# Altium PCB ENCITECH_6211-0100-43.PcbDoc
Units mm, origin at the board's own origin, x right, y up, seen from the top; angles counter-clockwise.
Board outline 24 x 39.5 mm, 4 copper layers (Top Layer, L2_GND, L3_PWR, Bottom Layer), stack 1.58 mm thick; 2 components, 0 nets, 52 pads, 0 vias.
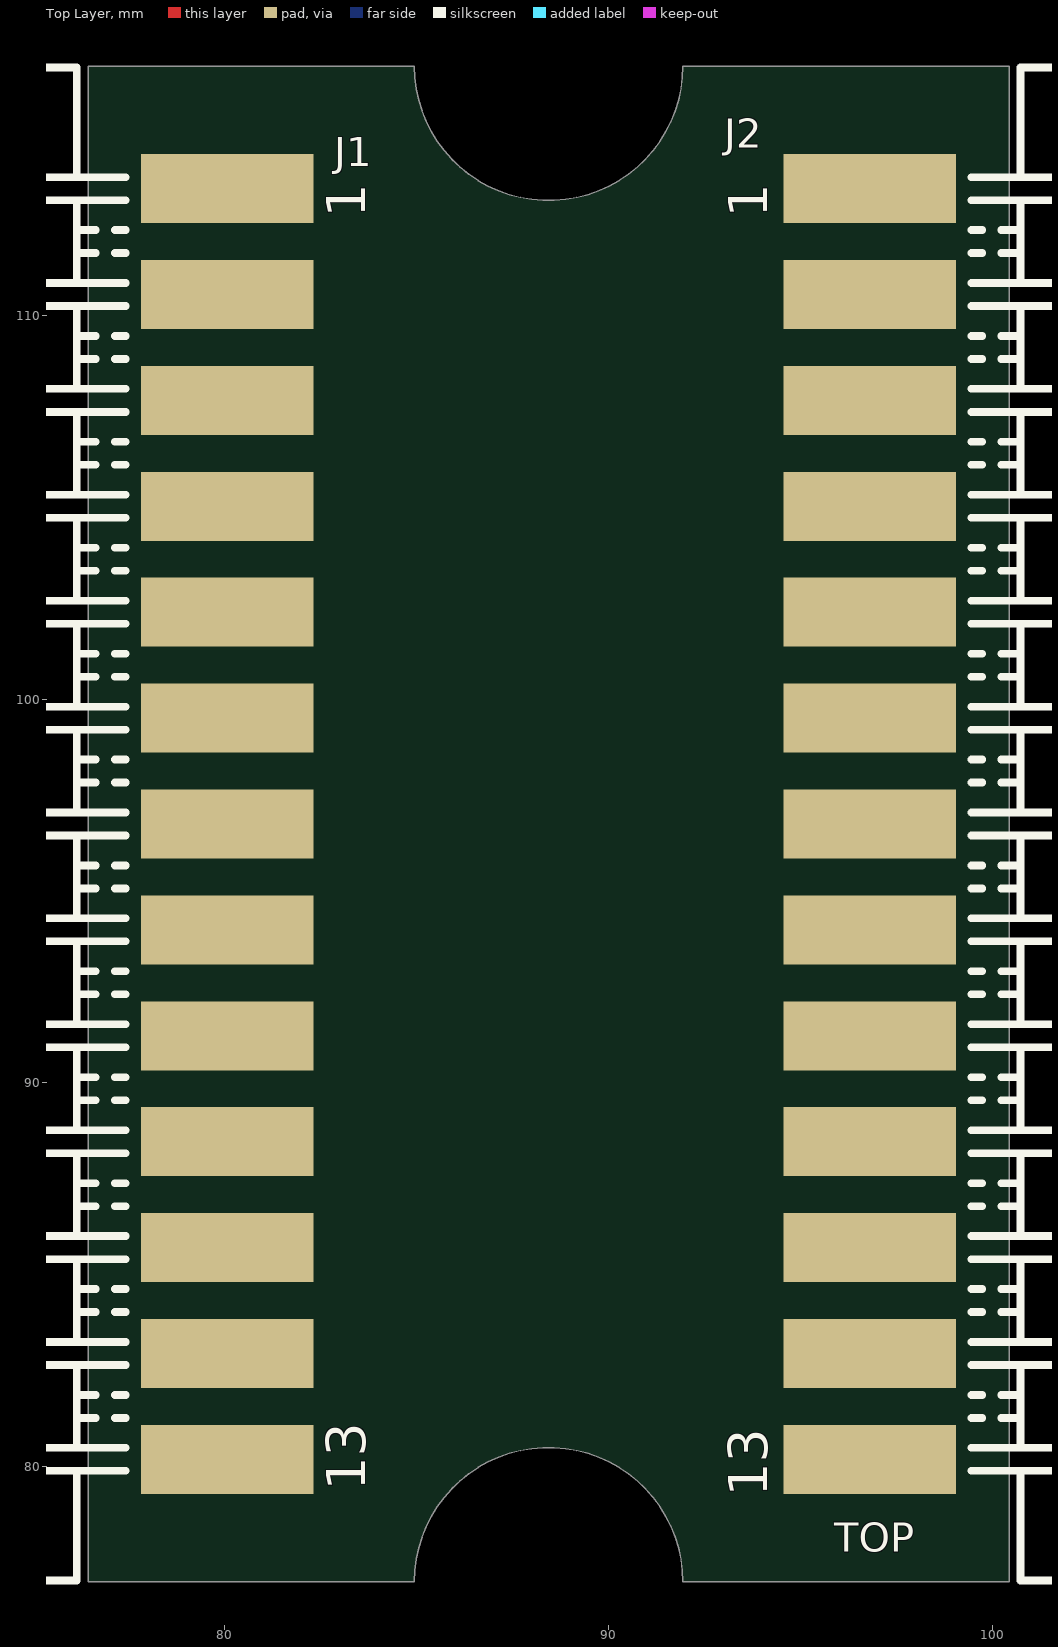
[diagram p0: Top Layer view]
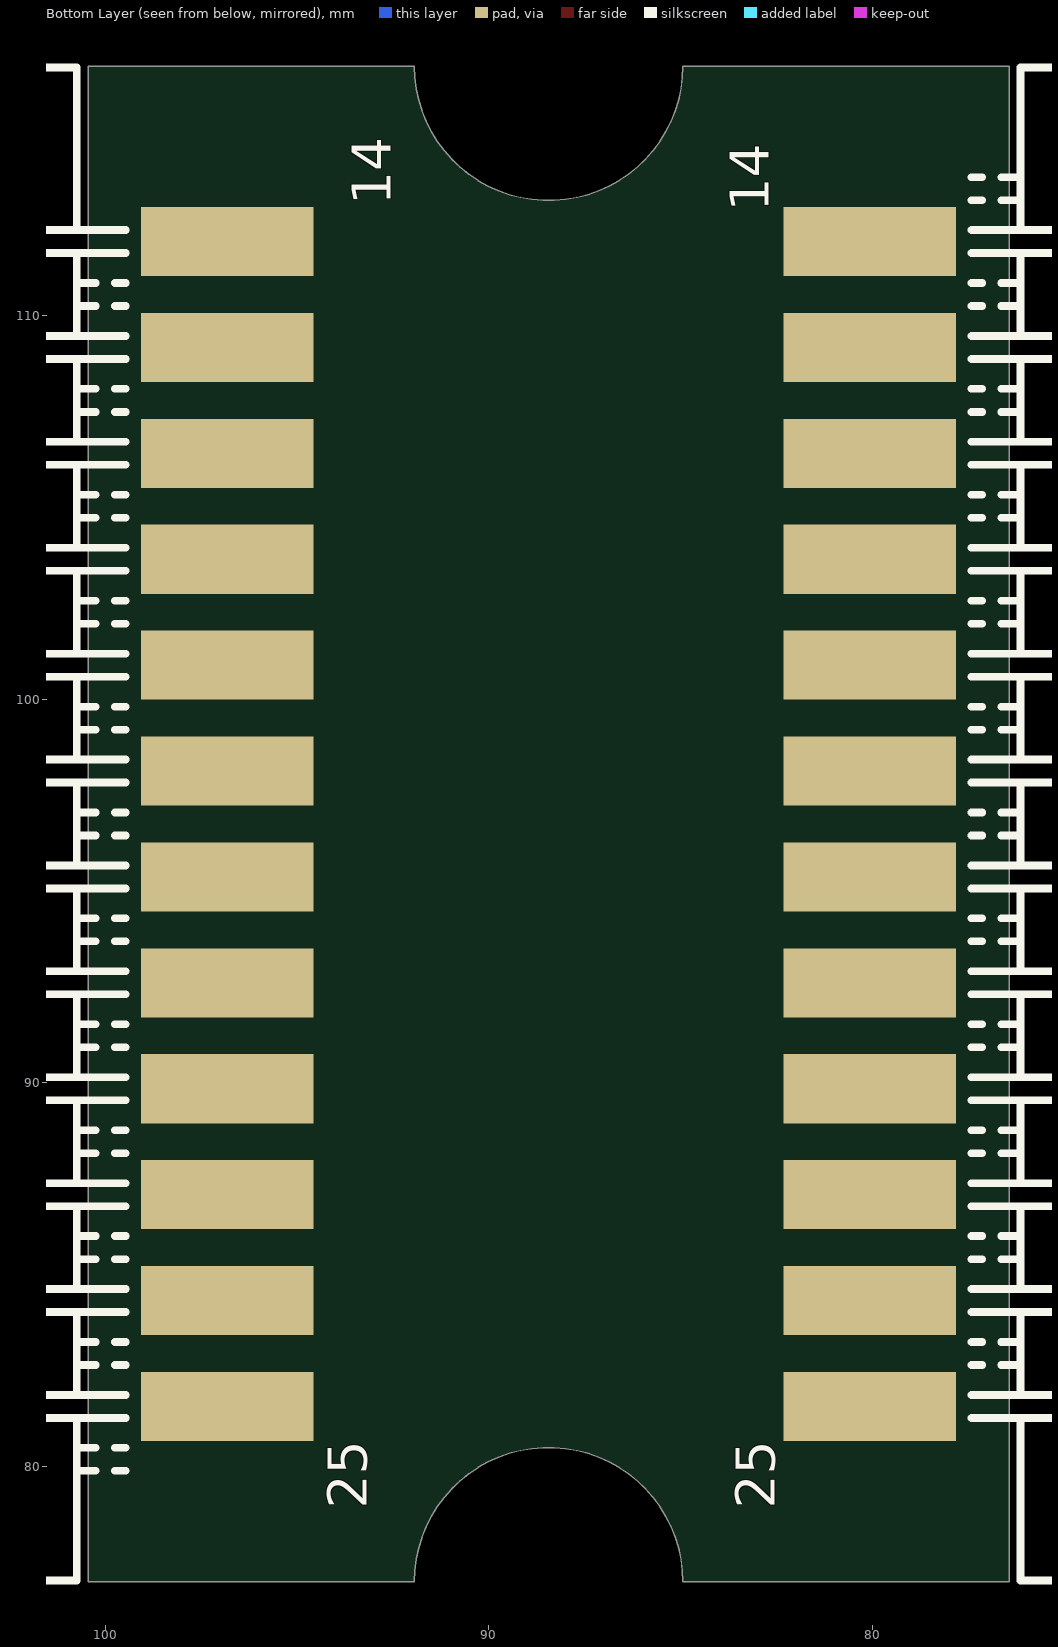
[diagram p1: Bottom Layer view, seen from below]
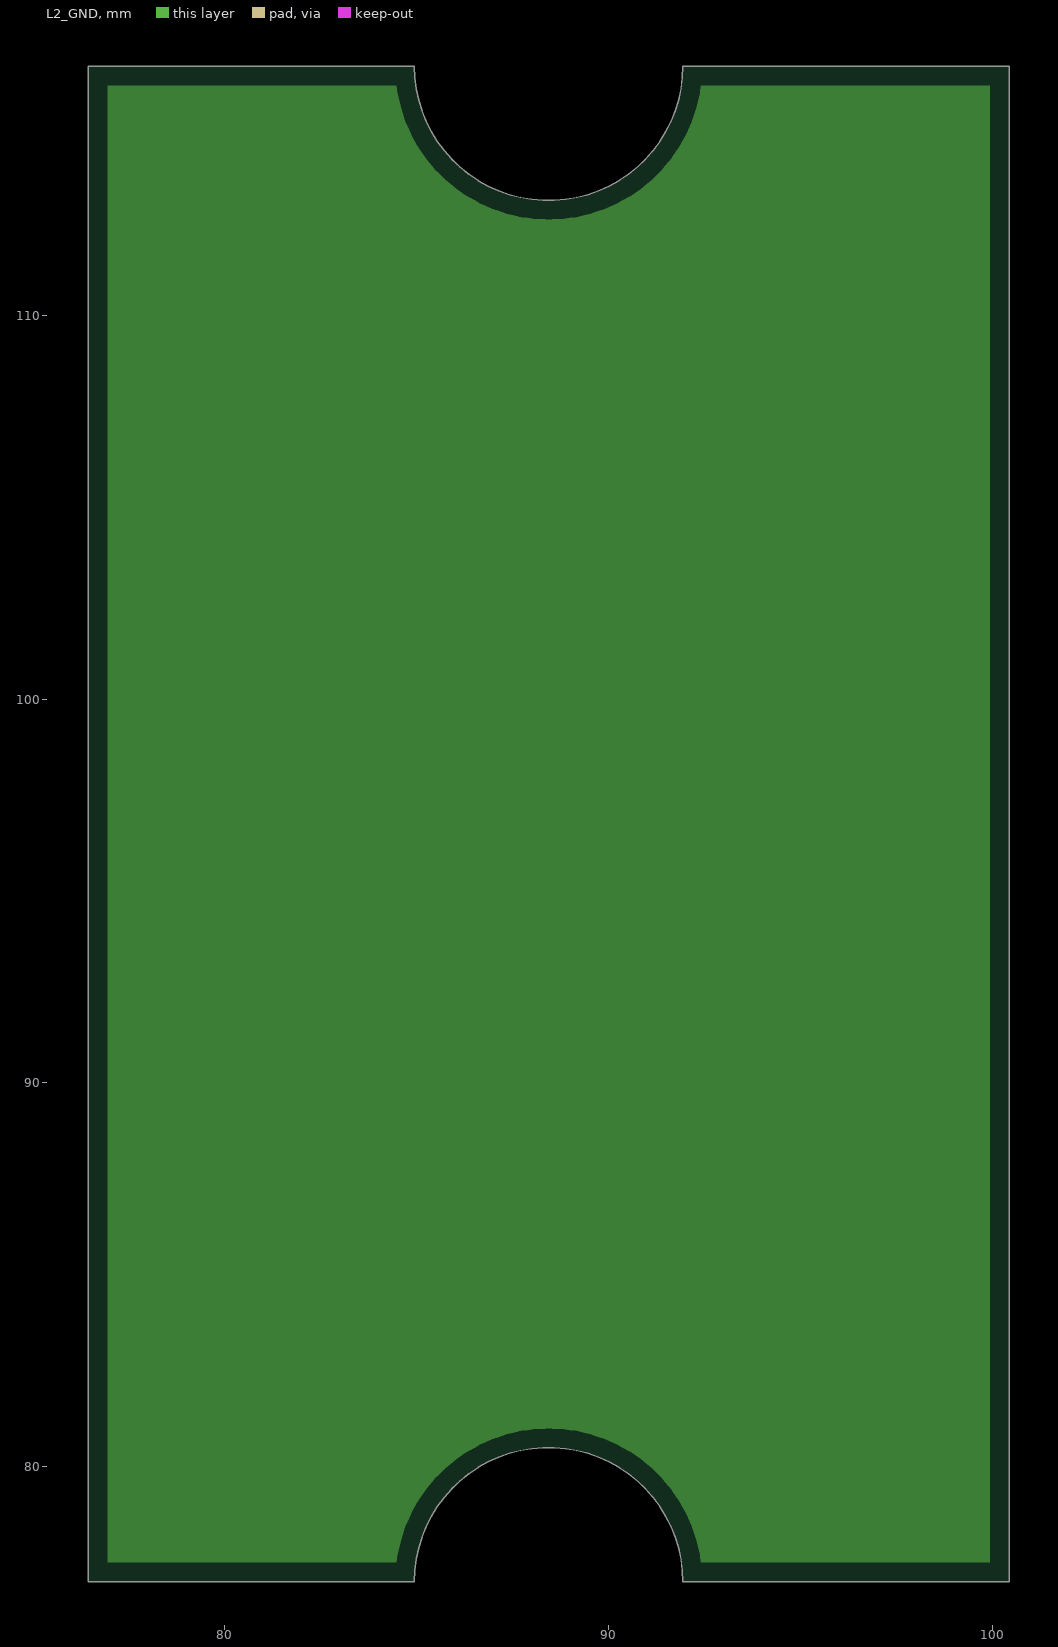
[diagram p2: L2_GND, clearances drawn from the general rule]
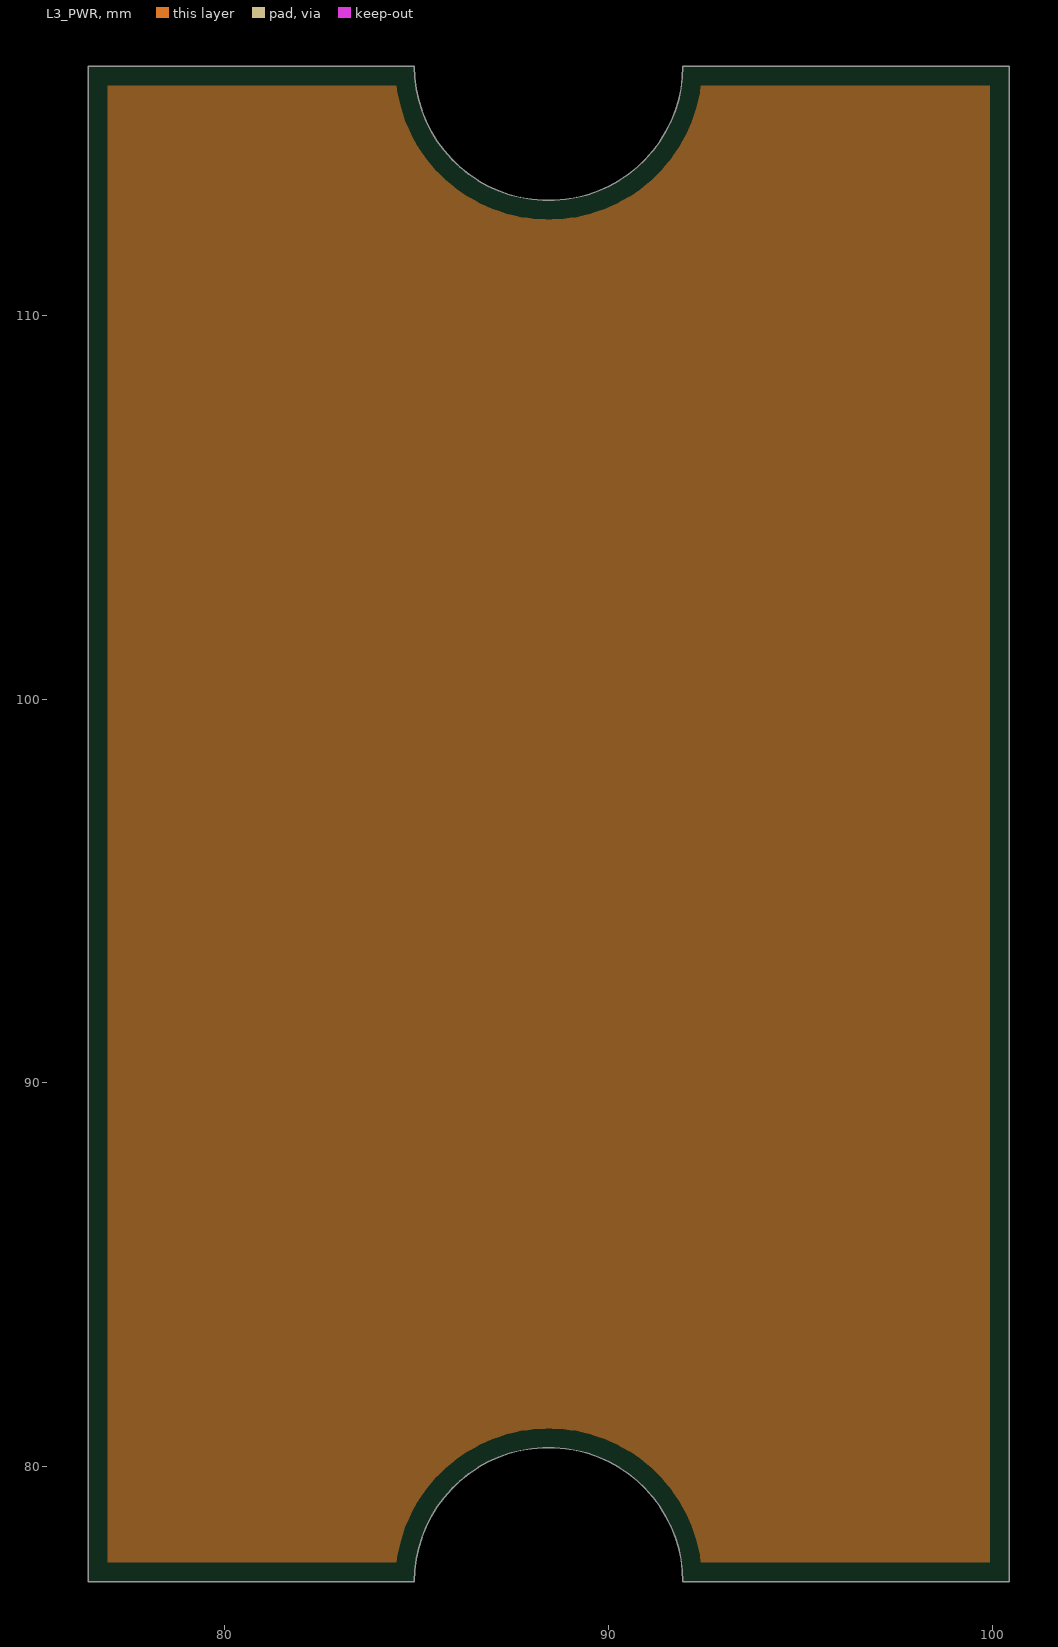
[diagram p3: L3_PWR, clearances drawn from the general rule]

## Layer stack, top to bottom
Top Solder: solder mask 0.01, Solder Resist, Dk 3.5
Top Layer: signal copper 0.035
Dielectric1: prepreg 0.22, FR-4, Dk 4.7
L2_GND: plane copper 0.035
Dielectric2: core 1, Dk 4.7
L3_PWR: plane copper 0.035
Dielectric3: prepreg 0.22, FR-4, Dk 4.7
Bottom Layer: signal copper 0.035
Bottom Solder: solder mask 0.01, Solder Resist, Dk 3.5

## Board outline
76.44,77 76.44,116.5 84.94,116.5 ccw(c88.44,116.5) 91.94,116.5 100.44,116.5 100.44,77 91.94,77 ccw(c88.44,77) 84.94,77

## Design rules (kind name [scope] priority, off if disabled: settings)
Clearance Clearance_Mires [OnLayer('Keep-Out Layer') vs HasFootprint('FIDUCIAL_TOP_S200-400')] p1: gap=0 except(2.9: Track-SMDPad)
Clearance [All] p2: gap=0.31
ComponentClearance ComponentClearance_Overlapping [InComponentClass('Overlapping') or InComponentClass('NotMounted') vs InComponentClass('Overlapping')] p1: gap=0 collisioncheckmode=3 verticalgap=0 showdistances=FALSE
ComponentClearance [not InComponentClass('Overlapping')] p2: gap=0.2 collisioncheckmode=3 verticalgap=0.2 showdistances=FALSE
FabricationTestPointUsage TestPointUsage [All] p1: valid=0 allowmultiple=FALSE
FabricationTestpoint Testpoint [All] p1: side=3 testpointundercomponent=TRUE minsize=1.016 maxsize=2.54 preferedsize=1.524 minholesize=0 maxholesize=1.016 preferedholesize=0.813 testpointgrid=0.025 allowsidetop=TRUE allowsidebottom=TRUE usegrid=TRUE gridtolerance=0
Height [All] p1: minheight=0 maxheight=25 prefheight=10
HoleSize [All] p1: absolutevalues=TRUE maxlimit=5 minlimit=0.5 maxpercent=80.000 minpercent=20.000
HoleToHoleClearance [All] p1: gap=0.2 allowstackedmicrovias=TRUE
MinimumSolderMaskSliver [All] p1: minsoldermaskwidth=0.35
PermittedLayers [All] p1: toplayerpermitted=TRUE bottomlayerpermitted=FALSE
PlaneClearance [All] p1: clearance=0.5
PlaneConnect PlaneConnect_Vias [IsVia] p1: planeconnectstyle=Direct reliefexpansion=0.508 reliefentries=4 reliefconductorwidth=0.254 reliefairgap=0.254
PlaneConnect "PlaneConnect_0 > 0.5" [AsMM(HoleDiameter)<0.5] p2: planeconnectstyle=Relief reliefexpansion=0.3 reliefentries=4 reliefconductorwidth=0.2 reliefairgap=0.2
PlaneConnect "PlaneConnect_0.5 > 1" [(AsMM(HoleDiameter)>=0.5) and (AsMM(HoleDiameter)<1)] p3: planeconnectstyle=Relief reliefexpansion=0.3 reliefentries=4 reliefconductorwidth=0.25 reliefairgap=0.2
PlaneConnect "PlaneConnect_1 > 1.5" [(AsMM(HoleDiameter)>=1) and (AsMM(HoleDiameter)<1.5)] p4: planeconnectstyle=Relief reliefexpansion=0.3 reliefentries=4 reliefconductorwidth=0.3 reliefairgap=0.2
PlaneConnect "PlaneConnect_1.5 > 2" [(AsMM(HoleDiameter)>=1.5) and (AsMM(HoleDiameter)<2)] p5: planeconnectstyle=Relief reliefexpansion=0.3 reliefentries=4 reliefconductorwidth=0.4 reliefairgap=0.2
PlaneConnect [All] p6: planeconnectstyle=Relief reliefexpansion=0.3 reliefentries=4 reliefconductorwidth=0.5 reliefairgap=0.2
PolygonConnect PolygonConnect_Vias [IsVia] p1: connectstyle=Direct reliefconductorwidth=0.254 reliefentries=4 polygonreliefangle="90 Angle" airgapwidth=0.254
PolygonConnect "PolygonConnect_0 > 0.5" [AsMM(HoleDiameter)<0.5] p2: connectstyle=Relief reliefconductorwidth=0.2 reliefentries=4 polygonreliefangle="90 Angle" airgapwidth=0.2
PolygonConnect "PolygonConnect_0.5 > 1" [(AsMM(HoleDiameter)>=0.5) and (AsMM(HoleDiameter)<1)] p3: connectstyle=Relief reliefconductorwidth=0.25 reliefentries=4 polygonreliefangle="90 Angle" airgapwidth=0.2
PolygonConnect "PolygonConnect_1 > 1.5" [(AsMM(HoleDiameter)>=1) and (AsMM(HoleDiameter)<1.5)] p4: connectstyle=Relief reliefconductorwidth=0.3 reliefentries=4 polygonreliefangle="90 Angle" airgapwidth=0.2
PolygonConnect "PolygonConnect_1.5 > 2" [(AsMM(HoleDiameter)>=1.5) and (AsMM(HoleDiameter)<2)] p5: connectstyle=Relief reliefconductorwidth=0.4 reliefentries=4 polygonreliefangle="90 Angle" airgapwidth=0.2
PolygonConnect [All] p6: connectstyle=Relief reliefconductorwidth=0.5 reliefentries=4 polygonreliefangle="90 Angle" airgapwidth=0.2
RoomDefinition EDA-0xxxx-Vx-x_sch [InComponentClass('EDA-0xxxx-Vx-x_sch')] p1: confinementstyle=ConfineIn formatcopy=TRUE lockcomponents=FALSE outline 76.44,77 246.38,77 246.38,177 76.44,177
RoutingVias RoutingVias_NoNet [Not IsElectrical] p1: holewidth=0 width=0 viastyle="Through Hole" minholewidth=0 minwidth=0 maxholewidth=0 maxwidth=0
RoutingVias [All] p2: holewidth=0.5 width=1 viastyle="Through Hole" minholewidth=0.5 minwidth=1 maxholewidth=0.5 maxwidth=1
SilkToSilkClearance [All] p1: silktosilkclearance=0.2
SilkToSolderMaskClearance SilkscreenOverComponentPads [IsPad] p1: minsilkscreentomaskgap=0.225 clearancetoexposedcopper=TRUE
SolderMaskExpansion [All] p1: expansion=0
ViasUnderSMD [All] p1: allowed=FALSE
Width [All] p1: maxlimit=2.54 minlimit=0.305 preferedwidth=0.305
19 further rules are at their usual default settings.

## Classes and differential pairs
component class ComHV_PS_FGC3-DELTA_V3: J2

## Components (designator, comment, footprint, x,y, rotation, side; value= is the part's Value field where it differs from the comment)
J1 "D-Sub 25M" "HARTING_09 67 025 5655_a" 80.067,96.75 r90 top locked
J2 "D-Sub 25F" "HARTING_09 67 025 4755_a" 96.812,96.75 r270 top locked

## Footprints (in the part's own frame and the unit in brackets; to place one, negate y for a bottom-side part, rotate by r counter-clockwise, add the part's x,y. Pads: shape width x height; smd on the part's side, far side on the other; paste and mask are expansions set on the pad)
"HARTING_09 67 025 4755_a" [mm] "PCB Edge Mounting Footprint For Straight D-Sub 25 Female Contacts with Turned Soder Contacts and Hole"
  rect 1.8x4.5 smd paste-2.26: 1(-16.56,0) 2(-13.8,0) 3(-11.04,0) 4(-8.28,0) 5(-5.52,0) 6(-2.76,0) 7(0,0) 8(2.76,0) 9(5.52,0) 10(8.28,0) 11(11.04,0) 12(13.8,0) 13(16.56,0)
  rect 1.8x4.5 smd far side paste-2.26: 14(-15.18,0) 15(-12.42,0) 16(-9.66,0) 17(-6.9,0) 18(-4.14,0) 19(-1.38,0) 20(1.38,0) 21(4.14,0) 22(6.9,0) 23(9.66,0) 24(12.42,0) 25(15.18,0)
  silkscreen extent -26.6,2.65 26.59,15.93, body extent -26.6,-2.07 26.6,15.93, height 5.45
"HARTING_09 67 025 5655_a" [mm] "PCB Edge Mounting Footprint For D-Sub 25 Male Contacts with Turned Soder Contacts and Hole"
  rect 1.8x4.5 smd paste-2.26: 1(16.56,0) 2(13.8,0) 3(11.04,0) 4(8.28,0) 5(5.52,0) 6(2.76,0) 7(0,0) 8(-2.76,0) 9(-5.52,0) 10(-8.28,0) 11(-11.04,0) 12(-13.8,0) 13(-16.56,0)
  rect 1.8x4.5 smd far side paste-2.26: 14(15.18,0) 15(12.42,0) 16(9.66,0) 17(6.9,0) 18(4.14,0) 19(1.38,0) 20(-1.38,0) 21(-4.14,0) 22(-6.9,0) 23(-9.66,0) 24(-12.42,0) 25(-15.18,0)
  silkscreen extent -26.6,2.65 26.59,15.93, body extent -26.6,-2.07 26.6,15.93, height 5.45

## Part data
J1: library part "HARTING_09 67 025 5655_a", "Connector D-sub 25 Male"
J2: library part "HARTING_09 67 025 4755_a", "Connector D-sub 25 Female"

## Free pads (board coordinates)
  round 3.5 on Mech9: 1(74.04,67.1) 1(219.04,67.1)

## Nets (pads, with @x,y where several pads share a name; then routed paths per layer and width w, separated by ;. In a path a pad name is that pad's centre, name@x,y a point inside that pad or via, vN(x,y) a via of type N, cw(c..) or ccw(c..) an arc to the next point about the centre after c; other vN are vias at no path point)
pads on no net: J1.1 J1.2 J1.3 J1.4 J1.5 J1.6 J1.7 J1.8 J1.9 J1.10 J1.11 J1.12 J1.13 J1.14 J1.15 J1.16 J1.17 J1.18 J1.19 J1.20 J1.21 J1.22 J1.23 J1.24 J1.25 J2.1 J2.2 J2.3 J2.4 J2.5 J2.6 J2.7 J2.8 J2.9 J2.10 J2.11 J2.12 J2.13 J2.14 J2.15 J2.16 J2.17 J2.18 J2.19 J2.20 J2.21 J2.22 J2.23 J2.24 J2.25

## Polygon pours and split planes (outlines as drawn)
no net on L2_GND (split plane): 99.938,77.502 92.41,77.502 92.408,77.522 92.365,77.781 92.306,78.036 92.23,78.286 92.137,78.532 92.029,78.77 91.906,79.001 91.768,79.223 91.615,79.436 91.449,79.639 91.27,79.83 91.079,80.009 90.876,80.175 90.663,80.328 90.441,80.466 90.21,80.589 89.971,80.697 89.726,80.79 89.476,80.866 89.221,80.925 88.962,80.968 88.702,80.994 88.44,81.002 88.178,80.994 87.918,80.968 87.659,80.925 87.404,80.866 87.153,80.79 86.908,80.697 86.67,80.589 86.439,80.466 86.216,80.328 86.004,80.175 85.801,80.009 85.61,79.83 85.431,79.639 85.265,79.436 85.112,79.223 84.974,79.001 84.851,78.77 84.742,78.532 84.65,78.286 84.574,78.036 84.515,77.781 84.472,77.522 84.47,77.502 76.942,77.502 76.942,115.998 84.47,115.998 84.472,115.978 84.515,115.719 84.574,115.464 84.65,115.214 84.742,114.968 84.851,114.73 84.974,114.499 85.112,114.277 85.265,114.064 85.431,113.861 85.61,113.67 85.801,113.491 86.004,113.325 86.216,113.172 86.439,113.034 86.67,112.911 86.908,112.802 87.153,112.71 87.404,112.634 87.659,112.575 87.918,112.532 88.178,112.506 88.44,112.498 88.702,112.506 88.962,112.532 89.221,112.575 89.476,112.634 89.726,112.71 89.971,112.802 90.21,112.911 90.441,113.034 90.663,113.172 90.876,113.325 91.079,113.491 91.27,113.67 91.449,113.861 91.615,114.064 91.768,114.277 91.906,114.499 92.029,114.73 92.137,114.968 92.23,115.214 92.306,115.464 92.365,115.719 92.408,115.978 92.41,115.998 99.938,115.998
no net on L3_PWR (split plane): 99.938,77.502 92.41,77.502 92.408,77.522 92.365,77.781 92.306,78.036 92.23,78.286 92.137,78.532 92.029,78.77 91.906,79.001 91.768,79.223 91.615,79.436 91.449,79.639 91.27,79.83 91.079,80.009 90.876,80.175 90.663,80.328 90.441,80.466 90.21,80.589 89.971,80.697 89.726,80.79 89.476,80.866 89.221,80.925 88.962,80.968 88.702,80.994 88.44,81.002 88.178,80.994 87.918,80.968 87.659,80.925 87.404,80.866 87.153,80.79 86.908,80.697 86.67,80.589 86.439,80.466 86.216,80.328 86.004,80.175 85.801,80.009 85.61,79.83 85.431,79.639 85.265,79.436 85.112,79.223 84.974,79.001 84.851,78.77 84.742,78.532 84.65,78.286 84.574,78.036 84.515,77.781 84.472,77.522 84.47,77.502 76.942,77.502 76.942,115.998 84.47,115.998 84.472,115.978 84.515,115.719 84.574,115.464 84.65,115.214 84.742,114.968 84.851,114.73 84.974,114.499 85.112,114.277 85.265,114.064 85.431,113.861 85.61,113.67 85.801,113.491 86.004,113.325 86.216,113.172 86.439,113.034 86.67,112.911 86.908,112.802 87.153,112.71 87.404,112.634 87.659,112.575 87.918,112.532 88.178,112.506 88.44,112.498 88.702,112.506 88.962,112.532 89.221,112.575 89.476,112.634 89.726,112.71 89.971,112.802 90.21,112.911 90.441,113.034 90.663,113.172 90.876,113.325 91.079,113.491 91.27,113.67 91.449,113.861 91.615,114.064 91.768,114.277 91.906,114.499 92.029,114.73 92.137,114.968 92.23,115.214 92.306,115.464 92.365,115.719 92.408,115.978 92.41,115.998 99.938,115.998

## Other copper
Top Layer:
  text "EDA-0XXXX-V1" at 26.049,92.71 h1.5
  text "TOP" at 32.399,90.17 h1.5
  text ".Layer_Name" at 130.175,32.385 h1.91 r45
  text "1" at 129.222,27.305 h2.54
Bottom Layer:
  text "EDA-0XXXX-V1" at 41.924,92.71 h1.5
  text "BOT" at 36.209,90.17 h1.5
  text ".Layer_Name" at 157.48,44.45 h1.91 r45
  text "4" at 143.827,27.305 h2.54
L2_GND (plane layer: these items are gaps in the copper):
  rectangle: 127,26.035 132.08,31.115
  rectangle: 137.16,26.035 147.32,31.115
  text ".Layer_Name" at 135.255,32.385 h1.91 r45
  text "2" at 133.985,27.305 h2.54
L3_PWR (plane layer: these items are gaps in the copper):
  rectangle: 127,26.035 137.16,31.115
  rectangle: 142.24,26.035 147.32,31.115
  text ".Layer_Name" at 147.32,39.37 h1.91 r45
  text "3" at 138.748,27.305 h2.54

## Silkscreen, mask and mechanical layers (free items; w line width, h text height)
Top Overlay:
  circle w0.3: c41.606,102.9 r0.2
  circle w0.203: c28.673,106.385 r2.775
  lines w0.2: 34.964,104.255 34.964,105.255 ; 34.964,105.855 34.964,106.755
  lines w0.203: 26.001,105.639 26.719,103.067 ; 27.144,105.283 ccw(c29.904,105.552) 27.922,107.491 ; 28.119,101.66 30.723,104.516 ; 28.673,109.16 33.986,109.16 33.986,105.855 34.964,105.855 ; 31.375,107.016 32.569,101.905 ; 32.649,105.16 33.122,108.473 ; 33.986,105.255 33.986,101.6 41.606,101.6 41.606,102.9 ; 33.999,105.255 34.964,105.255 ; 34.964,104.255 ccw(c35.464,104.367) 35.464,103.855 37.364,103.855 ; 34.964,106.755 cw(c35.797,106.422) 35.464,107.255 37.364,107.255 cw(c37.364,106.688) 37.864,106.955 cw(c38.414,106.588) 38.964,106.955 39.214,106.455 39.464,106.955 ; 36.564,105.155 ccw(c36.597,105.338) 36.764,105.255 37.864,105.255 37.864,104.455 ccw(c37.344,103.881) 37.365,104.655 ; 36.564,105.955 cw(c36.597,105.772) 36.764,105.855 37.864,105.855 37.864,106.655 cw(c37.364,107.18) 37.364,106.455 35.864,106.455 35.864,105.955 36.564,105.955 ; 36.564,105.155 35.864,105.155 35.864,104.655 37.364,104.655 ; 37.364,103.855 ccw(c37.296,104.534) 37.864,104.155 ; 37.864,104.155 ccw(c38.206,104.263) 38.564,104.255 38.564,105.955 38.864,105.455 ccw(c39.214,105.595) 39.564,105.455 39.864,105.955 39.864,104.255 ; 39.464,106.955 cw(c40.014,106.648) 40.564,106.955 ; 39.864,104.255 ccw(c40.214,104.205) 40.564,104.255 ; 40.564,104.255 40.564,106.955
  text "TITRE" at 30.494,110.49 h2
  text "TE/MPE" at 35.256,107.95 h1
  text "CERN" at 26.557,105.791 h1.25
  text "XXX/XXX" at 34.939,102.235 h1
  text "EDA-0XXXX-V1" at 26.049,98.425 h1.5
  text "TOP" at 32.399,95.885 h1.5
  text "TOP" at 95.885,77.787 h0.76
  text ".Layer_Name" at 161.29,41.275 h1.91
Bottom Overlay:
  text "EDA-0XXXX-V1" at 41.924,98.425 h1.5
  text "BOT" at 36.209,95.885 h1.5
  text ".Layer_Name" at 201.93,41.275 h1.91
Top Paste:
  text ".Layer_Name" at 161.29,36.195 h1.91
Bottom Paste:
  text ".Layer_Name" at 201.93,36.195 h1.91
Top Solder:
  text ".Layer_Name" at 161.29,38.735 h1.91
Bottom Solder:
  text ".Layer_Name" at 201.93,38.735 h1.91
Mechanical 1:
  lines w0.1: 76.44,77 84.94,77 cw(c88.44,77) 91.94,77 100.44,77 100.44,116.5 91.94,116.5 cw(c88.44,116.5) 84.94,116.5 76.44,116.5 76.44,77
  lines w1.27: 76.44,77 84.94,77 cw(c88.44,77) 91.94,77 100.44,77 100.44,116.5 91.94,116.5 cw(c88.44,116.5) 84.94,116.5 76.44,116.5 76.44,77
Mechanical 2:
  text "Components" at 212.09,41.275 h1.91
  text ".Component_Count" at 229.87,41.275 h1.91
  text "Pins" at 212.09,38.735 h1.91
  text ".Pad_Count" at 229.87,38.735 h1.91
  text "Vias" at 212.09,36.195 h1.91
  text ".Via_Count" at 229.87,36.195 h1.91
  text "Holes" at 212.09,33.655 h1.91
  text ".Hole_Count" at 229.87,33.655 h1.91
  text "Nets" at 212.09,31.115 h1.91
  text ".Net_Count" at 229.87,31.115 h1.91
Corners:
  lines w0.254: 71.44,77 76.44,77 76.44,72 ; 71.44,116.5 76.44,116.5 76.44,121.5 ; 100.44,72 100.44,77 105.44,77 ; 100.44,121.5 100.44,116.5 105.44,116.5 ; 132.08,26.035 132.08,31.115 ; 137.16,26.035 137.16,31.115 ; 142.24,26.035 142.24,31.115 ; 127,26.035 147.32,26.035 147.32,31.115 127,31.115 127,26.035
Title Block:
  circle w0.305: c61.595,38.735 r3.81
  lines w0.254: 59.69,37.473 ccw(c64.135,37.465) 60.403,39.879 ; 68.58,37.465 68.58,41.91 ; 71.12,34.29 113.03,34.29 ; 71.12,37.465 113.03,37.465 ; 71.12,40.64 113.03,40.64 ; 85.09,31.115 85.09,43.815 ; 57.15,31.115 69.85,31.115 69.85,43.815 57.15,43.815 57.15,31.115 ; 71.12,31.115 113.03,31.115 113.03,43.815 71.12,43.815 71.12,31.115
  lines w0.305: 58.039,37.363 59.055,34.29 ; 61.087,31.242 64.16,35.916 ; 61.595,42.545 69.215,43.18 ; 65.329,39.497 67.945,31.115
  text "Number" at 72.39,41.275 h1.91
  text "EDA-0XXXX-V1" at 86.36,41.275 h1.91
  text "Drawn By" at 72.39,38.1 h1.91
  text "XXX" at 86.36,38.1 h1.91
  text "CERN" at 58.42,37.846 h2.54
  text "DATE" at 72.39,34.925 h1.91
  text "XX-XX-XXXX" at 86.36,34.925 h1.91
  text "MOD." at 72.39,31.75 h1.91
  text "-" at 86.36,31.75 h1.91
  text "Print Date" at 72.39,28.575 h1.27
  text ".Print_Date" at 87.63,28.575 h1.27
  text ".Print_Time" at 100.33,28.575 h1.27
  text ".Print_Scale" at 72.39,26.035 h1.27
Notvisible:
  lines w0.05: 25.731,101.6 41.606,101.6 ; 25.731,101.6 25.731,109.22 ; 25.731,101.6 41.606,109.22 ; 25.731,109.22 41.606,109.22 ; 25.731,109.22 41.606,101.6 ; 41.606,101.6 41.606,109.22
  lines w0.1: 80.067,96.75 79.714,97.104 80.067,96.75 ; 80.067,96.75 80.421,97.104 80.067,96.75 ; 80.067,96.75 80.421,96.396 80.067,96.75 ; 80.067,96.75 79.714,96.396 80.067,96.75 ; 88.44,77 87.94,77 88.44,77 ; 88.44,77 88.44,77.5 88.44,77 ; 88.44,77 88.94,77 88.44,77 ; 88.44,77 88.44,76.5 88.44,77 ; 88.44,96.75 87.94,96.75 88.44,96.75 ; 88.44,96.75 88.44,97.25 88.44,96.75 ; 88.44,96.75 88.94,96.75 88.44,96.75 ; 88.44,96.75 88.44,96.25 88.44,96.75 ; 88.44,116.5 87.94,116.5 88.44,116.5 ; 88.44,116.5 88.44,117 88.44,116.5 ; 88.44,116.5 88.94,116.5 88.44,116.5 ; 88.44,116.5 88.44,116 88.44,116.5 ; 96.812,96.75 97.166,96.396 96.812,96.75 ; 96.812,96.75 96.459,96.396 96.812,96.75 ; 96.812,96.75 96.459,97.104 96.812,96.75 ; 96.812,96.75 97.166,97.104 96.812,96.75
  lines w0.254: 127,32.385 147.32,32.385 ; 130.175,32.385 137.795,40.005 ; 135.255,32.385 142.875,40.005 ; 140.335,32.385 147.955,40.005 ; 145.415,32.385 153.035,40.005
Panelisation:
  drawing of 578 lines, arcs and shapes, not listed
  text "Area Without Copper and Without Solder Mask - On Both Sides" at 85.234,183.425 h2.54
  text "OPTICAL TARGET 2x2mm" at 223.697,139.879 h3 r90
  text "2.4" at 136.104,122.71 h1.52 r90
  text "1.2" at 135.593,101.288 h1.52 r90
  text "ALL DIMENSIONS ARE IN MILLIMETERS" at 65.866,82.301 h5 r90
  text "Ø3.5 ±0.05" at 225.602,79.444 h3 r90
  text "NOT PLATED HOLE" at 228.777,79.444 h3 r90
  text "Area Without Copper and Without Solder Mask - On Both Sides" at 89.837,61.505 h2.54
Drill Drawing:
  lines w0.381: 133.966,91.969 133.966,99.614 ; 148.821,91.969 148.821,99.614 ; 174.499,91.969 174.499,99.614 ; 184.611,91.969 184.611,99.614 ; 121.161,91.969 200.77,91.969 200.77,99.614 121.161,99.614 121.161,91.969 ; 121.161,95.791 200.77,95.791 121.161,95.791
  text "Symbol" at 123.455,96.938 h1.83
  text "Hit Count" at 135.113,96.938 h1.83
  text "Finished Hole Size" at 149.968,96.938 h1.83
  text "Plated" at 175.646,96.938 h1.83
  text "Hole Type" at 185.758,96.938 h1.83

## Dimensions
59.04,59.6 to 59.04,67.1 on Panelisation
59.04,59.6 to 74.04,67.1 on Panelisation
234.04,188.4 to 209.04,179 on Panelisation
234.04,188.4 to 234.04,180.89 on Panelisation
59.04,59.6 to 99.24,103 on Panelisation
76.44,77 to 76.44,116.5 on Mechanical 2
76.44,116.5 to 100.44,116.5 on Mechanical 2
88.44,77 to 90.011,71.596 on Drill Drawing
76.44,116.5 to 88.44,117 on Drill Drawing

## Text inside footprints (layer, text, board x,y; h text height)
J1: Top Overlay "1" at 83.661,112.554 h1.02 r90; Top Overlay "13" at 83.661,79.375 h1.02 r90; Bottom Overlay "14" at 82.709,112.712 h1.02 r270; Bottom Overlay "25" at 82.55,78.899 h1.02 r270; Mechanical 14 "1" at 82.367,114.82 h1.2 r90; Mechanical 14 "1" at 82.267,78.28 h1.2 r90
J2: Top Overlay "1" at 94.139,112.554 h1.02 r90; Top Overlay "13" at 94.139,79.216 h1.02 r90; Bottom Overlay "14" at 92.551,112.871 h1.02 r270; Bottom Overlay "25" at 93.186,78.899 h1.02 r270; Mechanical 14 "1" at 94.612,115.22 h1.2 r270; Mechanical 14 "13" at 94.512,78.68 h1.2 r270